# Altium PCB PCB_Power_Measurement.PcbDoc (part 2 of 2)
Units mil, origin at the board's own origin, x right, y up, seen from the top; angles counter-clockwise.
Board outline 2558.96 x 1849.37 mil, 4 copper layers (Top Layer, Layer 1, Layer 2, Bottom Layer), stack 22.4 mil thick; 69 components, 59 nets, 316 pads, 95 vias.
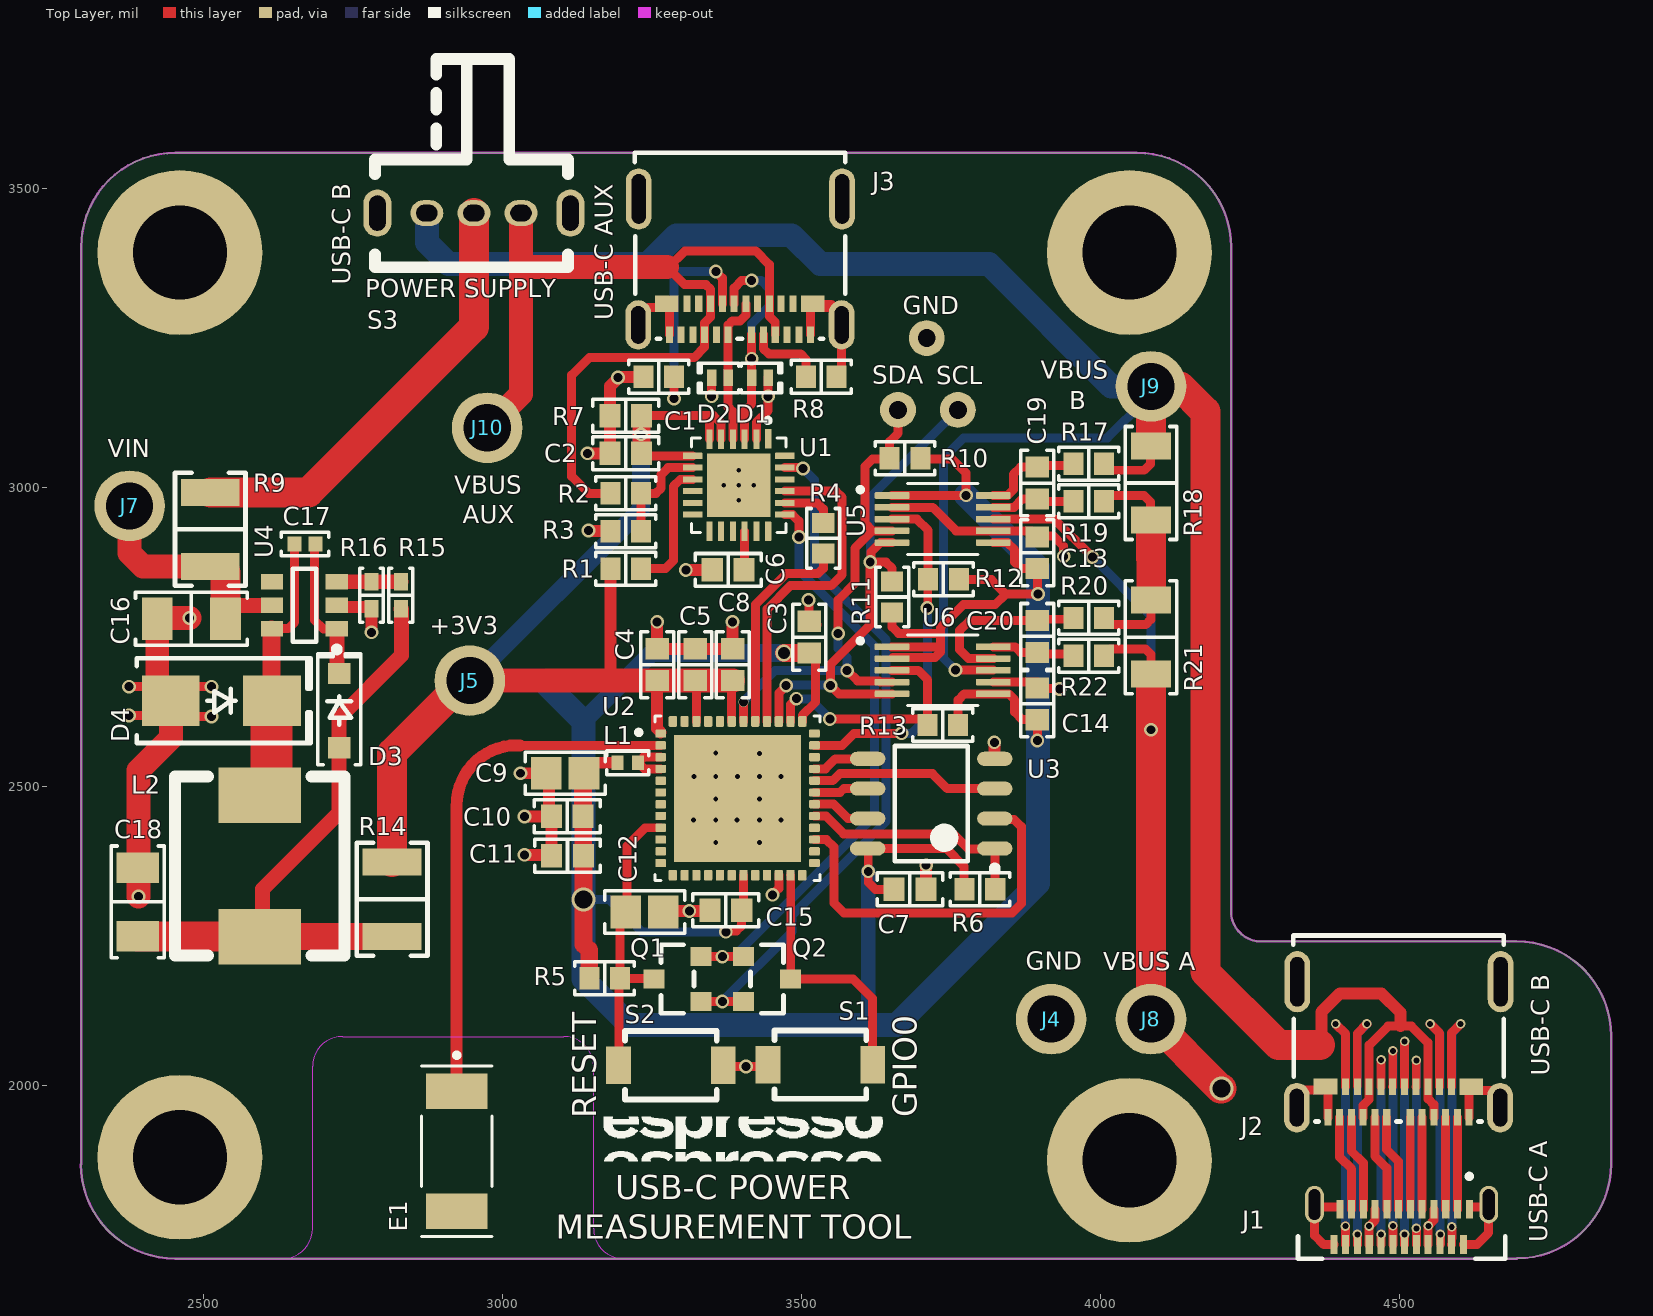
[diagram p0: Top Layer view]

## Via types
v1: diameter 23, hole 15, Top Layer to Bottom Layer, tented both sides, 43 vias
v2: diameter 16, hole 8, Top Layer to Bottom Layer, tented bottom, 21 vias
v3: diameter 16, hole 10, Top Layer to Bottom Layer, tented both sides, 18 vias
v4: diameter 23, hole 15, Top Layer to Bottom Layer, tented bottom, 9 vias
v5: diameter 40, hole 30, Top Layer to Bottom Layer, tented both sides, 2 vias
v6: diameter 16, hole 15, Top Layer to Bottom Layer, tented both sides, 1 vias
v7: diameter 28, hole 20, Top Layer to Bottom Layer, tented both sides, 1 vias

## Nets (pads, with @x,y where several pads share a name; then routed paths per layer and width w, separated by ;. In a path a pad name is that pad's centre, name@x,y a point inside that pad or via, vN(x,y) a via of type N, cw(c..) or ccw(c..) an arc to the next point about the centre after c; other vN are vias at no path point) (continued)
NetC17_2: C17.2 D3.2 U4.1 | length 227.1
  Top Layer w15: C17.2@2686.02,2897.05 2686.02,2778.54 2700.79,2763.78 U4.1
  Top Layer w25: U4.1 2723.43,2699.11 D3.2@2723.72,2698.82
NetC18_1: C18.1 D3.1 L2.2 R14.1 R15.2 | length 1072.2
  Top Layer w25: L2.2@2593.01,2249.51 2599.41,2255.91 2599.41,2328.74 2727.36,2456.69 D3.1 2727.36,2615.16 2831.4,2719.19 2831.4,2796.56 R15.2
  Top Layer w45: L2.2@2593.01,2249.51 R14.1
  Top Layer w50: C18.1 2391.24,2249.51 L2.2@2593.01,2249.51
NetC19_1: C19.1 R19.2 U5.9 | length 141.6
  Top Layer w15: U5.9 3856.15,2967.06 3870.15,2981.05 C19.1 3899.05,2977 R19.2
NetC19_2: C19.2 R17.2 U5.10 | length 171
  Top Layer w15: U5.10 3845.04,2986.74 3855,2996.7 3855,3022 3867.2,3034.2 C19.2 3897.9,3037.1 3952.51,3037.1 R17.2
NetC20_1: C20.1 R20.2 U6.9 | length 293.6
  Top Layer w15: U6.9 3779.96,2714.04 3765,2729 3765,2761 3781.57,2777.57 C20.1 3897.21,2779.79 3953.2,2779.79 R20.2
NetC20_2: C20.2 R22.2 U6.10 | length 140.2
  Top Layer w15: U6.10 3857.91,2733.72 3867.2,2724.43 C20.2 3897.71,2721.71 3952.7,2721.71 R22.2
NetD1_1: D1.1 J3.A6 J3.B6 U1.3 | length 405.9
  Top Layer w15: J3.B6 3387.8,3333.66 3400.59,3346.46 v1(3417.32,3346.46) ; U1.3 3405.51,3127.95 3417.32,3139.76 D1.1 J3.A6
  Bottom Layer w15: v1(3417.32,3215.55) 3417.32,3273.62 3446.85,3303.15 3446.85,3332.68 3433.07,3346.46 v1(3417.32,3346.46)
NetD2_1: D2.1 J3.A7 J3.B7 U1.4 | length 249.2
  Top Layer w15: U1.4 3385.83,3126.97 3377.95,3134.84 D2.1 J3.A7 3377.95,3271.65 3385.13,3278.83 3397.92,3278.83 3407.48,3288.39 J3.B7
NetE1_1: E1.1 U2.2 | length 877.7
  Top Layer w15: E1.1 E1.1@2927.94,1994.33 ; 3029.71,2568.9 U2.2
  Top Layer w20: E1.1@2924,1995 2924,2468.9 cw(c3024,2468.9) 3024,2568.9 3029.71,2568.9
NetJ1_A2: J1.A2 J2.A2 | length 153.8
  Top Layer w15: J1.A2@4597.38,1793.06 J2.A2
NetJ1_A3: J1.A3 J2.A3 | length 153.8
  Top Layer w15: J1.A3@4577.69,1793.06 J2.A3
NetJ1_A4: J1.A4 J1.A9 J1.B4 J1.B9 J8.1 R21.1 R22.1 U5.8 | length 1987.4
  Top Layer w10: R22.1 R22.1@4017.59,2730
  Top Layer w15: U5.8 3923.63,2947.37 v1(3987,2884) ; R22.1@4017.59,2730 4076,2730 4085,2721 R21.1 ; J1.B4 v3(4450,1765) 4450.05,1765 4459.87,1774.82 J1.A9 ; J1.B9 J1.B9 4548.5,1765.02 4558.3,1774.82 J1.A4
  Top Layer w50: J8.1 J8.1@4085,2112 ; R21.1@4085,2671 v1(4085,2595) J8.1@4085,2112 ; v5(4203,1995) 4201,1995 4085.5,2111.5 J8.1@4085,2112
  Layer 1 w15: v3(4450,1765) 4450,1797 4451,1798 ; 4548.81,1798 4548.81,1765.5 v3(4549,1765.31)
  Layer 1 w30: v5(4203,1995) 4205.74,1995 4324.74,1876 4371,1876 4450,1797 ; 4451,1798 4548.81,1798
  Bottom Layer w15: v1(3987,2884) 4085,2786 v1(4085,2595)
NetJ1_A5: J1.A5 J2.A5 | length 153.8
  Top Layer w15: J1.A5@4538.32,1793.06 J2.A5
NetJ1_A6: J1.A6 J2.A6 | length 153.8
  Top Layer w15: J1.A6@4518.64,1793.06 J2.A6
NetJ1_A7: J1.A7 J2.A7 | length 162
  Top Layer w15: J2.A7 4479.27,1892.87 4499.24,1872.89 J1.A7
NetJ1_A8: J1.A8 J2.A8 | length 162
  Top Layer w15: J2.A8 4459.58,1881.76 4479.56,1861.78 J1.A8
NetJ1_A10: J1.A10 J2.A10 | length 162
  Top Layer w15: J2.A10 4420.21,1890.54 4440.19,1870.56 J1.A10
NetJ1_A11: J1.A11 J2.A11 | length 162
  Top Layer w15: J2.A11 4400.53,1880.47 4420.5,1860.5 J1.A11
NetJ1_B2: J1.B2 J2.B2 | length 487.4
  Top Layer w15: v3(4394,2103) 4394,2102.73 4410.37,2086.36 J2.B2 ; J1.B2@4410,1734 v3(4410,1765)
  Bottom Layer w15: v3(4394,2103) 4394,2102.73 4410,2086.73 v3(4410,1765)
NetJ1_B3: J1.B3 J2.B3 | length 486.5
  Top Layer w15: J2.B3@4430,1999 4430,2087 v3(4446,2103) ; v3(4430.17,1751) 4430.26,1750.91 4430.26,1734.09 J1.B3
  Bottom Layer w15: v3@4430,1755.43 v3@4430.17,1755.26 ; v3(4430.17,1751) v3@4430.17,1755.26 ; v3(4446,2103) 4446,2102.73 4430.17,2086.9 v3@4430.17,1755.26
NetJ1_B5: J1.B5 J2.B5 | length 354.4
  Top Layer w15: J2.B5 4469.87,1998.44 v3(4469.87,2043) ; J1.B5 4469.86,1734.14 4469.86,1750.86 v3(4470,1751)
  Bottom Layer w15: v3(4469.87,2043) 4469.87,1751.13 v3(4470,1751)
NetJ1_B6: J1.B6 J2.B6 | length 384.2
  Top Layer w15: J2.B6 4489.37,1998.26 v3(4489.4,2058) v3(4489.4,2058) ; v3(4489.37,1765.31) 4489.5,1765.17 4489.5,1734.1 J1.B6
  Bottom Layer w15: v3(4489.37,1765.31) v3@4489.38,2057.95
NetJ1_B7: J1.B7 J2.B7 | length 416.2
  Top Layer w15: J2.B7 4508.94,1998.15 4508.94,2073.85 v3(4509.09,2074) ; v3(4509,1751) v3(4509,1751) 4509.04,1734.04 J1.B7
  Bottom Layer w15: v3(4509,1751) 4509,2073.91 v3(4509.09,2074)
NetJ1_B8: J1.B8 J2.B8 | length 352.2
  Top Layer w15: J2.B8 4528.63,1998.15 4528.63,2041.85 v3(4528.77,2042) ; J1.B8 4528.89,1734.11 4528.89,1760.89 v3(4529,1761)
  Bottom Layer w15: v3@4528.77,1761 v3(4528.77,2042)
NetJ1_B10: J1.B10 J2.B10 | length 484.7
  Top Layer w15: v3(4552,2103) 4567.85,2087.15 J2.B10 ; J1.B10@4568.83,1734.68 v3(4568.83,1751)
  Bottom Layer w15: v3(4552,2103) 4568.5,2086.5 v3@4568.5,1753
NetJ1_B11: J1.B11 J2.B11 | length 486.9
  Top Layer w15: J2.B11 4587.54,2087.54 v3(4603,2103) ; J1.B11 4588,1734.17 4588,1744.42 4588.5,1744.92 4588.5,1761.08 4588,1761.58 v3(4588,1763.63)
  Bottom Layer w15: v3@4588.5,1763.63 4588.5,2088.5 v3(4603,2103)
NetJ2_A4: J2.A4 J2.A9 J2.B4 J2.B9 J9.1 R17.1 R18.2 S3.3 U6.8 | length 4338.3
  Top Layer w15: v1(3758,2695) 3758.32,2694.68 U6.8@3820.97,2694.68 ; R17.1 4017.59,3029 4073.8,3029 4084,3039.2 4084,3068.65 R18.2 ; J2.A9 4439.9,1966.9 4449.74,1976.74 J2.B4 4449.74,2067.74 4481.42,2099.42 4502,2099.42 4520.58,2099.42 4548.27,2071.73 4548.27,1998.11 J2.B9 4548.46,1997.71 4548.46,1977.54 4558.01,1967.99 J2.A4
  Top Layer w20: 4368,2068 4370,2070 4370,2123 4401,2154 4470.42,2154 4502,2122.42 4502,2099.42
  Top Layer w50: R18.2@4085,3085 J9.1 4133.71,3169.29 4176,3127 4176,2190 4298,2068 4368,2068
  Bottom Layer w15: v1(3758,2695) 3738,2715 3738,3049.17 3771.83,3083 4012,3083 J9.1@4076,3147
  Bottom Layer w40: S3.3 2874.02,3409.98 2910,3374 3243.48,3374 3291.48,3422 3484,3422 3532,3374 3813.91,3374 4018.61,3169.29 J9.1@4076,3169.29 ; J9.1@4076,3147 J9.1@4076,3169.29 ; J9.1@4082,3164 J9.1@4076.71,3169.29 ; J9.1 J9.1@4076.71,3169.29 ; J9.1@4076,3169.29 4076,3170 J9.1@4076.71,3169.29 ; J9.1@4076,3169.29 J9.1@4076.71,3169.29
NetJ3_A4: J3.A4 J3.A9 J3.B4 J3.B9 J10.1 R2.2 S3.1 | length 1613.1
  Top Layer w15: R2.2 3144.49,2990.35 3116.14,3018.7 3116.14,3187.99 3145.67,3217.52 3320.87,3217.52 3338.58,3235.24 J3.A9 3338.58,3275.59 3348.43,3285.43 J3.B4 3348.43,3331.69 3340.55,3339.57 3305.02,3339.57 3277.3,3367.3 3306,3396 3423.88,3396 3446.85,3373.03 J3.B9 3446.85,3286.42 3456.69,3276.57 J3.A4
  Top Layer w40: J10.1 3031.5,3156.5 3031.5,3369 ; S3.1 3031.5,3369 ; 3275.59,3369 3031.5,3369
NetJ3_A5: J3.A5 R8.1 | length 131.4
  Top Layer w15: J3.A5 3437.01,3232.28 3445.87,3223.43 3499.02,3223.43 3507.87,3214.57 R8.1
NetJ3_B5: J3.B5 R7.2 | length 371.2
  Top Layer w15: v1(3287.4,3148.62) R7.2 ; v1(3357.28,3361.22) 3368.11,3350.39 J3.B5
  Bottom Layer w15: v1(3287.4,3148.62) 3287.4,3350.39 3298.23,3361.22 v1(3357.28,3361.22)
NetL1_1: L1.1 U2.3 U2.4 | length 83.8
  Top Layer w15: U2.4 3237.6,2529.53 L1.1 3236.73,2549.21 U2.3
NetQ1_1: Q1.1 Q2.2 U1.23 | length 1164.1
  Top Layer w15: Q1.1 v1(3368.11,2140.75) Q2.2 ; U1.23 3501.54,3033.46 v1(3503,3032)
  Bottom Layer w15: v1(3368.11,2140.75) 3484.82,2257.46 3484.82,2285.02 3642,2442.2 3642,2745.25 3522,2865.25 3522,3013 v1(3503,3032)
NetQ1_2: Q1.2 Q2.1 U1.19 | length 996.7
  Top Layer w15: Q1.2 v1(3368.11,2215.55) Q2.1 ; U1.19 3485.28,2954.72 3496.28,2943.72 v1(3496.28,2917.54)
  Bottom Layer w15: v1(3368.11,2215.55) 3387.55,2215.55 3623,2451 3623,2735 3496.28,2861.72 v1(3496.28,2917.54)
NetQ2_3: Q2.3 S1.1 U2.23 | length 441
  Top Layer w15: Q2.3 Q2.3@3482.58,2178.15 ; U2.23 3482.58,2351.48 Q2.3@3482.58,2178.15 ; S1.1@3607.6,2034 3619.6,2046 3619.6,2145.4 3586.85,2178.15 Q2.3@3482.58,2178.15
NetR1_1: R1.1 U1.9 | length 221
  Top Layer w15: R1.1 3272.83,2864.37 3286.42,2877.95 3286.42,3001.97 3298.23,3013.78 U1.9
NetR2_1: R2.1 R3.2 U1.8 | length 180.7
  Top Layer w15: R3.2 R2.1 3257.09,2990.35 3265.75,2999.02 3265.75,3021.65 3277.56,3033.46 U1.8
NetR4_1: R4.1 U2.41 | length 358.6
  Top Layer w15: U2.41 3423.3,2608.93 3423.3,2804.17 3475.13,2856 3528,2856 3537,2865 R4.1
NetR4_2: R4.2 U1.20 | length 92.1
  Top Layer w15: U1.20 3526.59,2974.41 3537,2964 R4.2
NetR6_2: R6.2 U2.29 U3.1 | length 390.5
  Top Layer w10: U3.1@3823.03,2395.67 U3.1
  Top Layer w15: U2.29 3541.34,2450.79 3571.13,2421 3754.2,2421 3779.53,2395.67 U3.1@3823.03,2395.67 ; R6.2@3823.82,2330.71 U3.1
NetR9_1: R9.1 S3.2 | length 746
  Top Layer w30: R9.1 R9.1@2512.11,2991.83
  Top Layer w50: R9.1@2512.11,2991.83 2675.83,2991.83 2952.76,3268.76 S3.2
NetR10_2: pad.4 R10.2 U2.42 U5.4 U6.4 | length 853.4
  Top Layer w15: U2.42 v6(3403.54,2641.46) ; v1(3562,2756) 3562,2812 3590,2840 3590,2898.37 3619.31,2927.69 ; v1(3577,2694) 3594.34,2676.66 3630.56,2676.66 3632.55,2674.67 U6.4 ; U5.4 3619.31,2927.69 ; pad.4 3662,3091 3648,3077 R10.2 3647,3048 3619.6,3048 3607,3035.4 3607,2940 3619.31,2927.69
  Bottom Layer w15: v6(3403.54,2641.46) 3456.09,2694 v1(3577,2694) 3577,2715.72 3562,2730.72 v1(3562,2756)
NetR11_2: pad.7@3762,3130 R11.2 U2.39 U5.5 U6.5 | length 920.3
  Top Layer w15: U2.39 3463.04,2609.3 3463.04,2656.88 v1(3475,2668.84) ; U6.5 3563.02,2654.98 v1(3549,2669) 3549,2704 3615,2770 3615,2874.87 v1(3615.56,2875.44) ; R11.2 3652,2865 3641.56,2875.44 v1(3615.56,2875.44) ; U5.5 3632.55,2908 3617.09,2892.54 3617.09,2876.97 v1(3615.56,2875.44)
  Bottom Layer w15: v1(3475,2668.84) 3476.16,2670 3548,2670 v1(3549,2669) ; v1(3615.56,2875.44) 3615.56,2983.56 pad.7@3762,3130
NetR12_2: R12.2 U2.35 U5.3 | length 590.2
  Top Layer w15: U2.35 3568.36,2568.9 3588.46,2589 v1(3668,2589) ; U5.3 3693.63,2947.37 3712.41,2928.59 R12.2 3711.7,2846.3 3711.7,2799.25 v1(3711,2798.54)
  Bottom Layer w15: v1(3668,2589) 3685,2589 3711,2615 v1(3711,2798.54)
NetR13_2: R13.2 U2.38 U6.3 | length 421
  Top Layer w15: U2.38 3482.28,2637.28 v1(3492,2647) ; v1(3548,2613) 3702.18,2613 R13.2@3711.41,2603.77 ; U6.3 3695.65,2694.35 3711.41,2678.59 R13.2@3711.41,2603.77 ; R13.2 R13.2@3711.41,2603.77
  Bottom Layer w15: v1(3492,2647) 3492.53,2646.47 3514.53,2646.47 v1(3548,2613)
NetR15_1: R15.1 R16.2 U4.3 | length 107.3
  Top Layer w25: U4.3 R16.2 R15.1
NetR18_1: R18.1 R19.1 R20.1 R21.2 | length 357.5
  Top Layer w10: R20.1 R20.1@4017.59,2771 ; R21.2@4085.35,2812 R21.2@4085.5,2820
  Top Layer w15: R19.1 4016.59,2987 4073,2987 4084,2976 4084,2946.63 R18.1 ; R20.1@4017.59,2771 4076,2771 4084.77,2779.77 R21.2@4085.35,2812
  Top Layer w50: R18.1@4085.05,2933.99 R21.2@4085.5,2820
NetU1_21: U1.21 U2.40 | length 566.9
  Top Layer w15: U2.40 3442.91,2796.91 3482,2836 3550,2836 3568.5,2854.5 3568.5,2983.66 3557.95,2994.21 3472.76,2994.21 U1.21
NetU2_5: U2.5
NetU2_27: U2.27 U3.2 | length 636.9
  Top Layer w15: U2.27 3542.32,2411.42 3555.12,2398.62 3555.12,2305.12 3571.85,2288.39 3852.36,2288.39 3868.11,2304.13 3868.11,2433.07 3856.3,2444.88 3825.39,2444.88 U3.2
NetU2_30: U2.30 U3.7 | length 100.2
  Top Layer w12: U2.30 U2.30@3523.13,2469.58
  Top Layer w15: U2.30 3554.53,2470.47 3578.54,2446.46 U3.7
NetU2_31: U2.31 U3.6 | length 91.6
  Top Layer w15: U2.31 3564.96,2490.16 3571.26,2496.46 U3.6
NetU2_32: U2.32 U3.3 | length 316.9
  Top Layer w15: U2.32 3552.85,2509.84 3564.67,2521.65 3719.49,2521.65 3744.68,2496.46 U3.3
NetU2_33: U2.33 U3.5 | length 96
  Top Layer w12: U3.5@3611.02,2546.26 U3.5
  Top Layer w15: U2.33 3540.35,2529.53 3557.09,2546.26 U3.5@3611.02,2546.26
pads on no net: E1.2 J3.A2 J3.A3 J3.A8 J3.A10 J3.A11 J3.B2 J3.B3 J3.B8 J3.B10 J3.B11 U1.1 U1.10 U1.11 U1.12 U1.13 U1.14 U1.15 U1.17 U1.18 U1.22 U1.24 U2.6 U2.7 U2.8 U2.10 U2.11 U2.12 U2.13 U2.14 U2.15 U2.16 U2.17 U2.18 U2.20 U2.21 U2.24 U2.25 U2.26 U2.28 U2.34 U2.36 U2.44 U2.45 U2.47 U2.48 U4.4

## Polygon pours and split planes (outlines as drawn)
GND on Layer 2 "Layer_2_GND" (solid, remove dead copper, pour order 2): 2268,3597 2268,1257 2849,1257 5010,1257 5010,3597
GND on Layer 2 "FTDI-GND-2" (solid, pour order 12): 3341,3058 3341,2951 3447,2951 3447,3058
GND on Layer 2 "ESP-GND-2" (solid, pour order 8): 3263,2612 3263,2350.24 3526,2350.24 3526,2612
GND on Layer 1 "Layer_1_GND" (solid, remove dead copper, pour order 0): 2268,3597 2268,1257 2849,1257 4981,1257 4981,3597
GND on Layer 1 "FTDI-GND-1" (solid, pour order 10): 3341,3058 3341,2952 3449,2952 3449,3058
GND on Layer 1 "ESP-GND-1" (solid, pour order 4): 3263,2611.76 3263,2350 3526,2350 3526,2611.76

## Keep-outs
Keep-Out Layer:
  lines w1: 2633,1710.63 ccw(c2633,1760.63) 2683,1760.63 2683,2032 cw(c2733,2032) 2733,2082 3103,2082 cw(c3103,2032) 3153,2032 3153,1760.63 ccw(c3203,1760.63) 3203,1710.63
  lines w3.94: 2295.52,1868.11 ccw(c2453,1868.11) 2453,1710.63 4696.63,1710.63 ; 2296,1868.59 2296,3402.52 cw(c2453.48,3402.52) 2453.48,3560 4061.52,3560 cw(c4061.52,3402.52) 4219,3402.52 4219,2291 ccw(c4269,2291) 4269,2241 4697,2241 cw(c4697,2083.52) 4854.48,2083.52 4854.48,1868.48 cw(c4697,1868.48) 4697,1711

## Silkscreen, mask and mechanical layers (free items; w line width, h text height)
Top Overlay:
  drawing of 16 lines, arcs and shapes, not listed
  text "USB-C B" at 2746,3339 h30 r90
  text "POWER SUPPLY" at 2771,3318 h30
  text "GND" at 3670,3290 h30
  text "USB-C AUX" at 3185,3280 h30 r90
  text "VBUS" at 3901,3182 h30
  text "SDA" at 3619,3174 h30
  text "SCL" at 3726,3173 h30
  text "B" at 3948,3131 h30
  text "VIN" at 2340,3051 h30
  text "VBUS" at 2920,2989.56 h30
  text "AUX" at 2934,2940 h30
  text "+3V3" at 2879,2755 h30
  text "GND" at 3876,2194 h30
  text "VBUS A" at 4005,2193 h30
  text "USB-C B" at 4751,2016 h30 r90
  text "GPIO0" at 3693,1947 h40 r90
  text "RESET" at 3157,1945 h40 r90
  text "USB-C POWER" at 3189.47,1810 h40
  text "MEASUREMENT TOOL" at 3089.5,1744 h40
  text "USB-C A" at 4748,1738 h30 r90